# Altium PCB PCB_SCH.PcbDoc
Units mil, origin at the board's own origin, x right, y up, seen from the top; angles counter-clockwise.
Board outline 2745 x 1375 mil, 2 copper layers (Top Layer, Bottom Layer); 10 components, 5 nets, 22 pads, 0 vias.
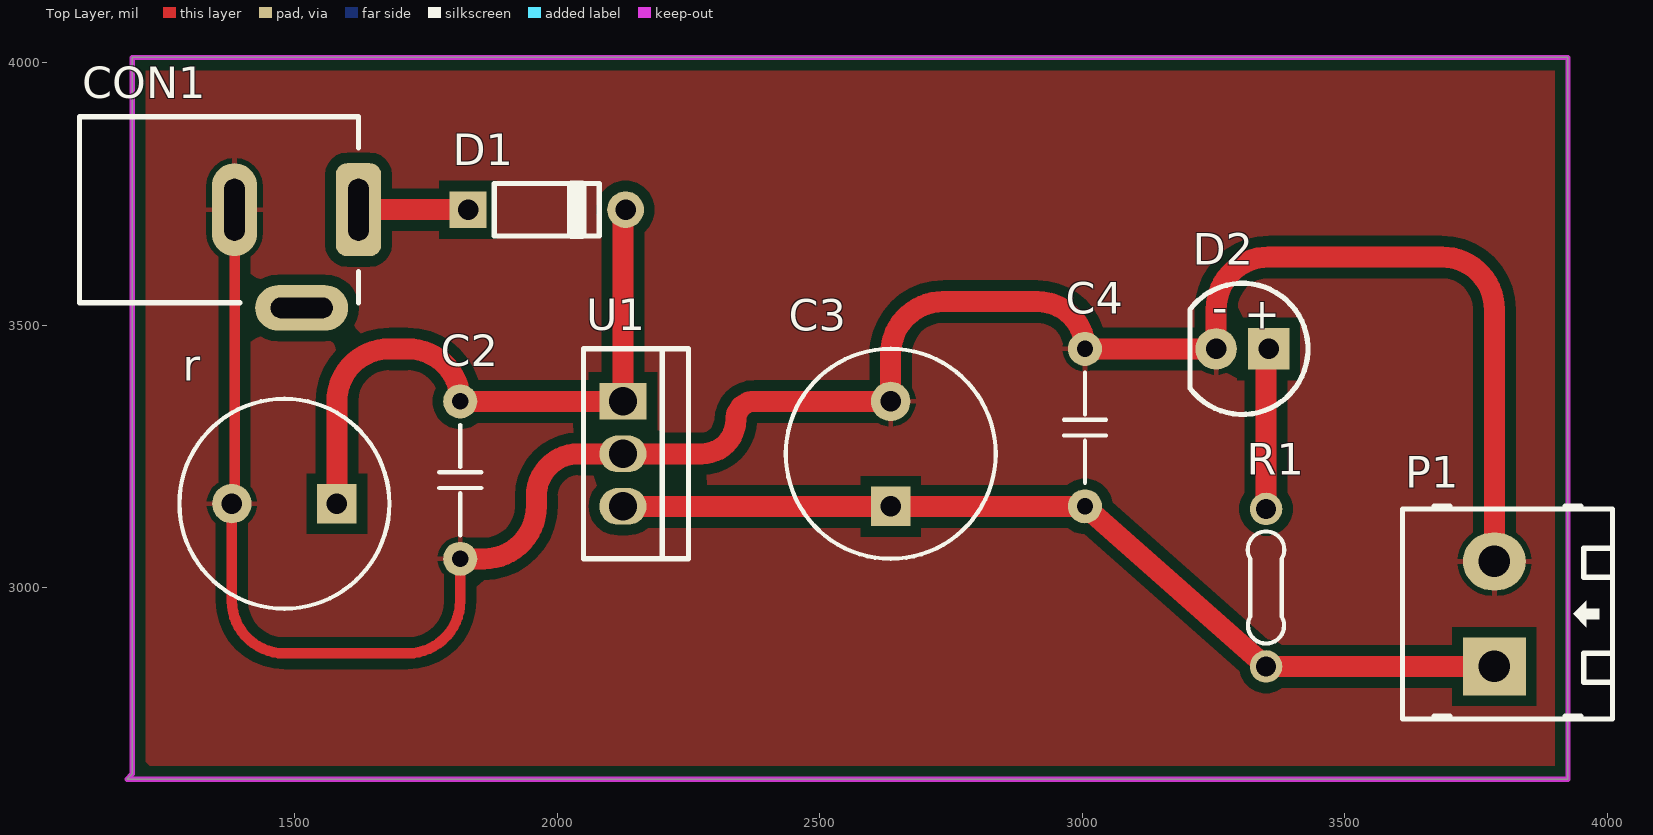
[diagram p0: Top Layer view]
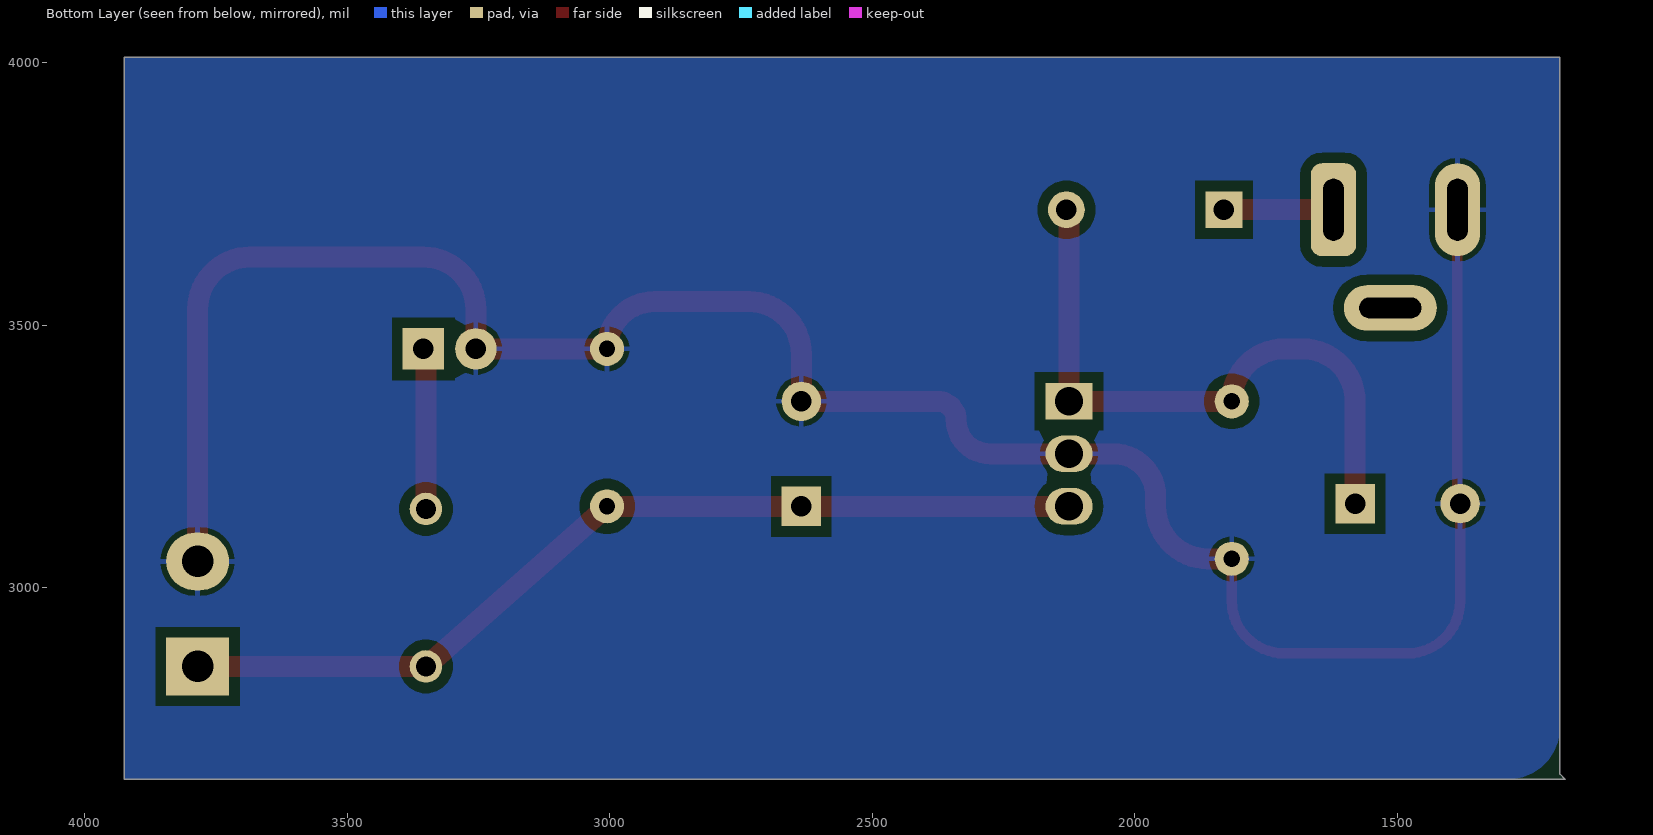
[diagram p1: Bottom Layer view, seen from below]
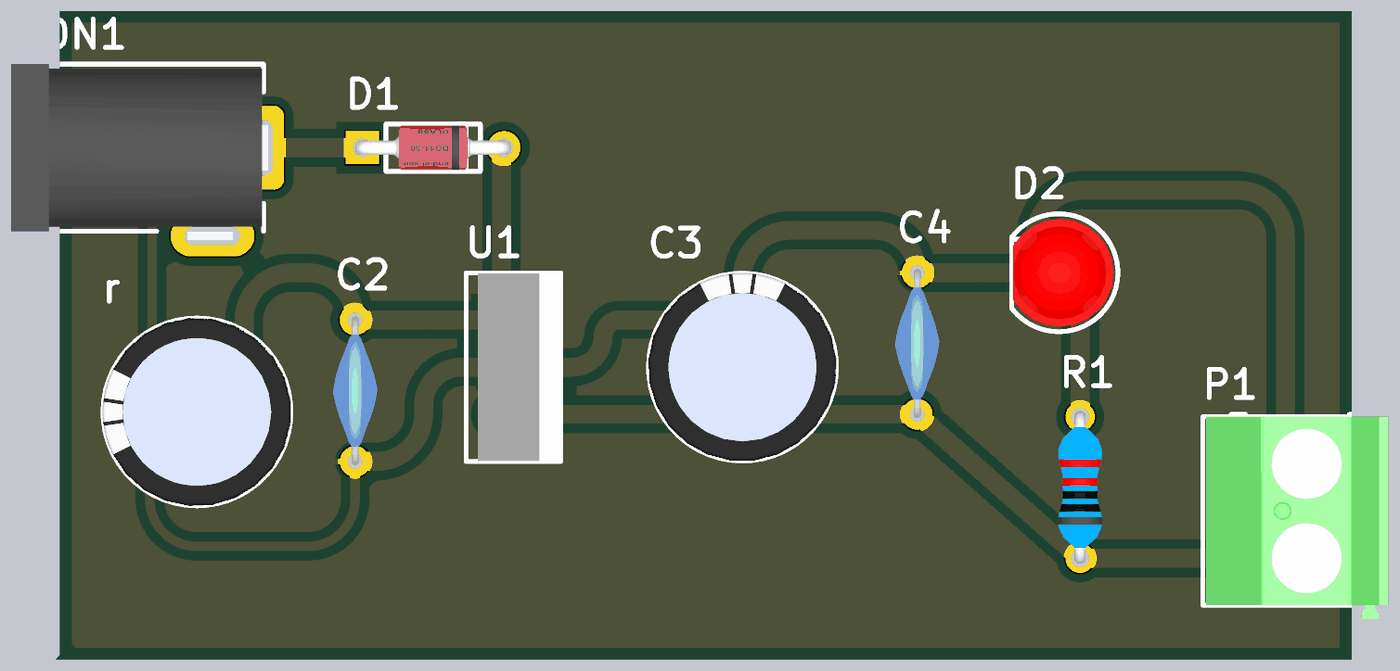
[diagram p2: 3D render of the assembled board from above, using the file's embedded part models]

## Layer stack, top to bottom
Top Solder: solder mask 0.4, Solder Resist, Dk 3.5
Top Layer: signal copper 1.4
Dielectric 1: dielectric 12.6, FR-4, Dk 4.8
Bottom Layer: signal copper 1.4
Bottom Solder: solder mask 0.4, Solder Resist, Dk 3.5

## Board outline
1180,2635 3925,2635 3925,4010 1190,4010 1190,2645

## Design rules (kind name [scope] priority, off if disabled: settings)
Clearance [All] p1: gap=20 ignorepadtopadclearanceinfootprint=FALSE
PolygonConnect [All] p1: connectstyle=Relief reliefconductorwidth=10 reliefentries=4 polygonreliefangle="90 Angle" airgapwidth=10
RoutingVias [All] p1: holewidth=28 width=50 viastyle="Through Hole" minholewidth=28 minwidth=50 maxholewidth=28 maxwidth=50
SolderMaskExpansion [All] p1: expansion=4 istentingtop=FALSE
SupplyNets "Schematic Supply Nets_1" [InNet('+5')] p1: voltage=0.000
SupplyNets "Schematic Supply Nets" [InNet('GND')] p2: voltage=0.000
Width [All] p1: maxlimit=100 minlimit=20 preferedwidth=40
30 further rules are at their usual default settings.

## Classes and differential pairs
component class SCH: D2

## Components (designator, comment, footprint, x,y, rotation, side; value= is the part's Value field where it differs from the comment)
C2 "104uF" "CAP Ceramic/W300" 1815,3355 r270 top
C3 "1000uF" CYL/D.400/LS.200 2635,3255 r90 top
C4 "104uF" "CAP Ceramic/W300" 3005,3155 r90 top
CON1 "CON DC PWR" CONN/DC/PWR/5.0MM 1621.22,3720 r0 top
D1 "1N4007" DO-41 1830,3720 r0 top
D2 "RED Led" LED_5mm_RED 3305,3455 r180 top
P1 "Header 2" HDR/Terminal/2 3785,2950 r90 top
r "1000uF" CYL/D.400/LS.200 1480,3160 r180 top (schematic designator C1)
R1 "1K" "R 1/4W/300" 3350,2850 r90 top
U1 "78xx" TO-220 2125,3355 r270 top

## Footprints (in the part's own frame and the unit in brackets; to place one, negate y for a bottom-side part, rotate by r counter-clockwise, add the part's x,y. Pads: shape width x height; smd on the part's side, far side on the other; paste and mask are expansions set on the pad)
"CAP Ceramic/W300" [mil]
  round 65 hole 31: 1(0,0) 2(300,0)
  silkscreen extent 45,-40 255,40, body extent -8,-47 307,47, height 340
CONN/DC/PWR/5.0MM [mm]
  rrect50% 2.2x4.5 hole 1 slot 3 at 90 deg: 1(0,0)
  oval 2.2x4.5 hole 1 slot 3 at 90 deg: 2(-6,0)
  oval 4.5x2.2 hole 1 slot 3 at 0 deg: 3(-2.75,-4.75)
  silkscreen extent -13.5,-4.5 0,4.5, body extent -13.58,-5 0.25,4.5, height 11.02
CYL/D.400/LS.200 [mil]
  rect 75x75 hole 39: 1(-100,0)
  round 75 hole 39: 2(100,0)
  silkscreen extent -200,-200 200,200, body extent -198,-199 200,199, height 500
DO-41 [mil]
  rect 70x70 hole 39.37: 1(0,0)
  round 70 hole 39.37: 2(300,0)
  silkscreen extent 50,-55 250,55, body extent -15,-47 315,47, height 99
HDR/Terminal/2 [mil] "Header 2, 2 pin, hight 400mil, Pin to Pin 200mil, Colour Green"
  rect 110x120 hole 60: 1(-100,0)
  oval 110x120 hole 60: 2(100,0)
  silkscreen extent -200,-225 205,175, body extent -229,-218 200,168, height 559
LED_5mm_RED [mm]
  rect 2x2 hole 1: 1(-1.27,0)
  round 2 hole 1: 2(1.27,0)
  silkscreen extent -3.17,-3.17 2.54,3.17, body extent -2.94,-2.9 2.45,2.9, height 8.72
"R 1/4W/300" [mil] "Through hole resitor, axial 300mils, 1/4W"
  round 62 hole 38: 1(0,0) 2(300,0)
  silkscreen extent 44,-35 257,35, body extent -12,-47 312,47, height 97
TO-220 [mil]
  rect 70x90 hole 54: 1(0,0)
  oval 70x90 hole 54: 2(100,0) 3(200,0)
  silkscreen extent -100,-75 300,125, body extent -100,-50 300,130, height 730

## Part data
C2 C4: library part "Capacitor NP", "Capacitor non-pol"
C3 r: library part Capacitor, "Capacitor pol"
CON1: "DC input connector"
D1: library part Diode, "Default Diode"
D2: library part LED_5mm_RED, "LED PTH 5mm Red."
P1: "Header, 2-Pin"
R1: library part Resistor, "Resistor"
U1: "LDO Fixed Voltage regulator"

## Nets (pads, with @x,y where several pads share a name; then routed paths per layer and width w, separated by ;. In a path a pad name is that pad's centre, name@x,y a point inside that pad or via, vN(x,y) a via of type N, cw(c..) or ccw(c..) an arc to the next point about the centre after c; other vN are vias at no path point)
+5: C3.1 C4.1 P1.1 R1.1 U1.3 | length 1775.5
  Top Layer w40: U1.3 C3.1 C4.1 R1.1 P1.1
GND: C2.2 C3.2 C4.2 CON1.2 D2.2 P1.2 r.2 U1.2 | length 4394.4
  Top Layer w20: CON1.2 1385,3165 cw(c1380,3165) r.2 1380,2975 ccw(c1480,2975) 1480,2875 1715,2875 ccw(c1715,2975) 1815,2975 C2.2
  Top Layer w40: C2.2 1860,3055 ccw(c1860,3155) 1960,3155 1960,3175 cw(c2040,3175) 2040,3255 U1.2 2275,3255 ccw(c2275,3320) 2340,3320 cw(c2375,3320) 2375,3355 C3.2 2635,3445 cw(c2735,3445) 2735,3545 2915,3545 cw(c2915,3455) C4.2 D2.2 3255,3530 cw(c3355,3530) 3355,3630 3685,3630 cw(c3685,3530) 3785,3530 P1.2
NetC1_1: C2.1 D1.2 r.1 U1.1 | length 1222
  Top Layer w40: r.1 1580,3355 cw(c1680,3355) 1680,3455 1715,3455 cw(c1715,3355) C2.1 U1.1 2125,3715 cw(c2130,3715) D1.2
NetCON1_1: CON1.1 D1.1 | length 208.8
  Top Layer w40: CON1.1 D1.1
NetD2_1: D2.1 R1.2 | length 305.6
  Top Layer w40: R1.2 3350,3435.63 D2.1
pads on no net: CON1.3

## Polygon pours and split planes (outlines as drawn)
GND on Bottom Layer "GND_L02_P000" (solid, remove dead copper, pour order 0): 1190,4010 1190,2735 ccw(c1290,2735) 1290,2635 3925,2635 3925,4010
GND on Top Layer "GND_L01_P001" (solid, remove dead copper, pour order 1): 1190,4010 1190,2735 ccw(c1290,2735) 1290,2635 3925,2635 3925,4010

## Keep-outs
Top Layer:
  lines w10: 1180,2635 1190,2645 1190,4010 3925,4010 3925,2635 1220,2635 1180,2635

## Text inside footprints (layer, text, board x,y; h text height)
D2: Top Overlay "+" at 3376.92,3544.21 h60 r180; Top Overlay "-" at 3276.92,3549.21 h60 r180